# Altium PCB CYUSB3314.PcbDoc
Units mil, origin at the board's own origin, x right, y up, seen from the top; angles counter-clockwise.
Board outline 1181.1 x 1181.1 mil, 2 copper layers (Top Layer, Bottom Layer); 138 components, 96 nets, 418 pads, 25 vias.
Unrouted connection lines stored in the file: 205.
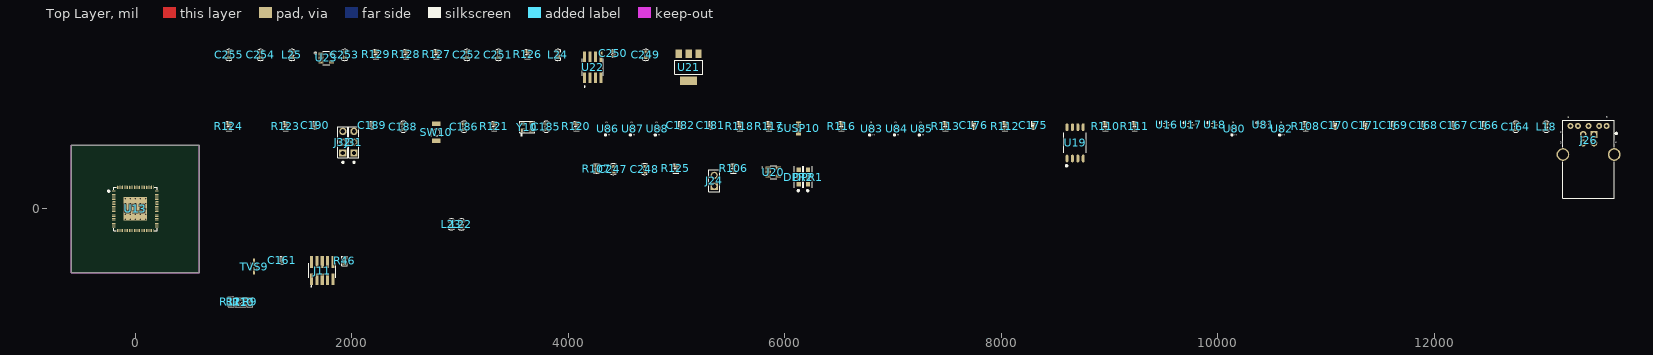
[diagram p0: Top Layer view]
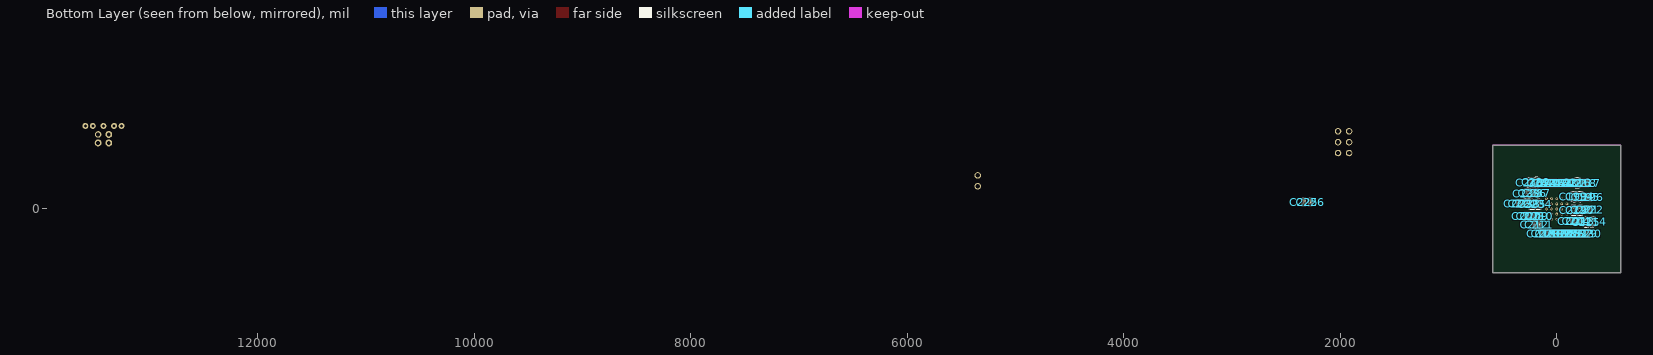
[diagram p1: Bottom Layer view, seen from below]

## Layer stack, top to bottom
Top Layer: signal copper 1.4
Dielectric: dielectric 12.6, FR-4, Dk 4.8
Bottom Layer: signal copper 1.4

## Board outline
-590.55,-590.55 590.55,-590.55 590.55,590.55 -590.55,590.55

## Design rules (kind name [scope] priority, off if disabled: settings)
Clearance [All] p1: gap=5
PolygonConnect [All] p1: connectstyle=Relief reliefconductorwidth=10 reliefentries=4 polygonreliefangle="90 Angle"
RoutingVias [All] p1: holewidth=28 width=50 viastyle="Through Hole" minholewidth=28 minwidth=50 maxholewidth=28 maxwidth=50
SilkscreenOverComponentPads [All] p1: minsilkscreentomaskgap=10
SolderMaskExpansion [All] p1: expansion=4
Width [All] p1: maxlimit=50 minlimit=5 preferedwidth=10
27 further rules are at their usual default settings.

## Classes and differential pairs
component class Cyusb3314_Indicator: C161 J11 R9 R10 R11 R12 R46 RS1 TVS9
component class Cyusb3314_Interface: C164 C166 C167 C168 C169 C170 C171 C175 C176 C181 C182 C185 C186 C188 C189 C190 C247 C248 DPR1 DPR2 J24 J26 J31 J32 L18 R106 R107 R108 R110 R111 R112 R113 R116 R117 R118 R120 R121 R123 R124 R125 SUSP10 SW10 U13 U16 U17 U18 U19 U20 U80 U81 U82 U83 U84 U85 U86 U87 U88 Y10
component class Cyusb3314_Power: C193 C194 C195 C196 C197 C198 C199 C200 C201 C202 C203 C204 C205 C206 C207 C208 C209 C210 C211 C212 C213 C214 C215 C216 C217 C218 C219 C220 C221 C222 C223 C224 C225 C226 C227 C228 C229 C230 C231 C232 C233 C234 C235 C236 C237 C238 C239 C240 C241 C242 C243 C244 C245 C246 L22 L23
component class Power: C249 C250 C251 C252 C253 C254 C255 L24 L25 R126 R127 R128 R129 U21 U22 U23

## Components (designator, comment, footprint, x,y, rotation, side; value= is the part's Value field where it differs from the comment)
C161 "0.1UF_16V" C0402 1357,-473 r90 top
C164 "1uF_16V" C0603 12755,759 r90 top
C166 "0.1UF_16V" C0402 12466,773 r90 top
C167 "0.1UF_16V" C0402 12186,773 r90 top
C168 "0.1UF_16V" C0402 11906,773 r90 top
C169 "0.1UF_16V" C0402 11626,773 r90 top
C170 "0.01UF_35V" C0402 11086,773 r90 top
C171 "0.1UF_35V" C0402 11366,773 r90 top
C175 "0.1UF_16V" C0402 8297,773 r90 top
C176 "0.1UF_16V" C0402 7748,773 r90 top
C181 "0.1UF_16V" C0402 5318,773 r90 top
C182 "0.1UF_16V" C0402 5038,773 r90 top
C185 "10pF_16V" C0603 3797,759 r90 top
C186 "10pF_16V" C0603 3037,759 r90 top
C188 "1.5uF_16V" C0603 2476,759 r90 top
C189 "0.1UF_16V" C0402 2187,773 r90 top
C190 "0.1UF_16V" C0402 1662,773 r90 top
C193 "10UF_10V" C0603 -160,114 r90 bottom
C194 "1UF_10V" C0603 -218,114.41 r90 bottom
C195 "0.1UF_10V" C0402 -267,109 r270 bottom
C196 "0.01UF_10V" C0402 -306,109 r270 bottom
C197 "0.01UF_10V" C0402 -14,-228 r90 bottom
C198 "0.1UF_10V" C0402 -54,-228 r90 bottom
C199 "0.01UF_10V" C0402 64,-228 r90 bottom
C200 "0.1UF_10V" C0402 25,-228 r90 bottom
C201 "0.01UF_10V" C0402 -143,238 r270 bottom
C202 "0.1UF_10V" C0402 -104,238 r270 bottom
C203 "0.001UF_10V" C0402 -145,-114 r90 bottom
C204 "0.01UF_10V" C0402 -184,-114 r90 bottom
C205 "0.001UF_10V" C0402 -93,-228 r90 bottom
C206 "0.01UF_10V" C0402 -132,-228 r90 bottom
C207 "0.001UF_10V" C0402 281,-67 r90 bottom
C208 "0.01UF_10V" C0402 241,-67 r90 bottom
C209 "0.001UF_10V" C0402 201,-66 r90 bottom
C210 "0.01UF_10V" C0402 161,-66 r90 bottom
C211 "0.001UF_10V" C0402 160,-146 r270 bottom
C212 "0.01UF_10V" C0402 201,-146 r270 bottom
C213 "0.1UF_10V" C0402 -223,-114 r90 bottom
C214 "1UF_10V" C0603 -331,-119.41 r270 bottom
C215 "22uF_10V" C0603 -273,-120.59 r270 bottom
C216 "10uF_16V" C0603 -191,241 r90 bottom
C217 "0.1UF_16V" C0402 -278,237 r270 bottom
C218 "0.01UF_16V" C0402 -239,236 r270 bottom
C219 "10uF_16V" C0603 -158,-12 r270 bottom
C220 "1.0uF_16V" C0603 -216,-12 r270 bottom
C221 "0.1UF_16V" C0402 -266,-7 r90 bottom
C222 "0.01UF_16V" C0402 -307,-7 r90 bottom
C223 "0.001UF_10V" C0402 354,48 r90 bottom
C224 "0.01UF_10V" C0402 315,48 r90 bottom
C225 "0.001UF_10V" C0402 2333,64 r90 bottom
C226 "0.01UF_10V" C0402 2273,62 r90 bottom
C227 "0.001UF_10V" C0402 142,-228 r90 bottom
C228 "0.01UF_10V" C0402 103,-228 r90 bottom
C229 "0.001UF_10V" C0402 -249,-228 r90 bottom
C230 "0.01UF_10V" C0402 -288,-228 r90 bottom
C231 "0.001UF_10V" C0402 -171,-228 r90 bottom
C232 "0.01UF_10V" C0402 -210,-228 r90 bottom
C233 "0.1UF_10V" C0402 276,48 r90 bottom
C234 "1UF_10V" C0603 168,43.41 r270 bottom
C235 "22uF_10V" C0603 226,42.59 r270 bottom
C236 "0.1UF_10V" C0402 221,147 r90 bottom
C237 "0.01UF_10V" C0402 182,147 r90 bottom
C238 "1UF_10V" C0603 271,142 r270 bottom
C239 "10uF_16V" C0603 187,244.59 r90 bottom
C240 "1.0uF_16V" C0603 245,243.59 r90 bottom
C241 "0.1UF_16V" C0402 95,238 r270 bottom
C242 "0.01UF_16V" C0402 137,238 r270 bottom
C243 "0.01UF_16V" C0402 -65,238 r270 bottom
C244 "0.1UF_16V" C0402 -25,238 r270 bottom
C245 "0.01UF_16V" C0402 55,238 r270 bottom
C246 "0.1UF_16V" C0402 15,238 r270 bottom
C247 "1.0uF_16V" C0603 4416,368 r90 top
C248 "1.0uF_16V" C0603 4706,368 r90 top
C249 "1u" C0603 4716,1423 r90 top
C250 "0.1u" C0402 4417,1437 r90 top
C251 "22uF_16V" C0603 3355,1423 r90 top
C252 "22uF_10V" C0603 3065,1423 r90 top
C253 "2.2nF" C0603 1935,1423 r90 top
C254 "10UF_10V" C0603 1157,1423 r90 top
C255 "22uF_6.3V" C0603 867,1423 r90 top
DPR1 "0R_0603" RC0603_3P 6216,294 r90 top
DPR2 "0R_0603" RC0603_3P 6129,294 r90 top
J11 "50MIL KEYED SMD_NL" SAMTEC_FTSH-105-01-L-DV-K 1627,-649 r0 top
J24 "HDR_1X2_NL" SAMTEC_TSW-102-08-G-S 5349,210 r90 top
J26 "USB3_B_CONN" FOXCONN_UEB1112C-2AK1-4H 13426.79,478 r0 top
J31 "3PIN JUMPER" TE_3-644456-3 2020,517 r90 top
J32 "3PIN JUMPER" TE_3-644456-3 1918,517 r90 top
L18 "BLM21PG221SN1D" L0603 13036,759 r90 top
L22 "BLM21PG221SN1D" L0603 3015,-143.41 r90 top
L23 "BLM21PG221SN1D" L0603 2921,-142.41 r90 top
L24 "4.7uH" L0603 3905,1423 r90 top
L25 "2.2uH" L0603 1447,1423 r90 top
R9 "10K" 0603S-RES 1060,-859.59 r270 top
R10 "10K" 0603S-RES 1001,-860.59 r270 top
R11 "10K" 0603S-RES 943,-859 r270 top
R12 "10K" 0603S-RES 883,-857.41 r270 top
R46 "10K" 0603S-RES 1934,-480 r90 top
R106 "10K" 0603S-RES 5528,375 r90 top
R107 "10K" 0603S-RES 4262,372 r270 top
R108 "1M_1%" 0603S-RES 10814,766 r90 top
R110 "2K" 0603S-RES 8964,766 r90 top
R111 "2K" 0603S-RES 9234,766 r90 top
R112 "200R_1%" 0603S-RES 8036,766 r90 top
R113 "6.04K_1%" 0603S-RES 7486,766 r90 top
R116 "10K" 0603S-RES 6526,766 r90 top
R117 "330R_1/8W" 0603S-RES 5856,766 r90 top
R118 "10K_NL" 0603S-RES 5586,766 r90 top
R120 "825R" 0603S-RES 4076,766 r90 top
R121 "10K" 0603S-RES 3316,766 r90 top
R123 "10K" 0603S-RES 1390,766 r90 top
R124 "10K" 0603S-RES 865,766 r90 top
R125 "1M" 0603S-RES 4995,375 r90 top
R126 "10K" 0603S-RES 3624,1430 r90 top
R127 "7.5K" 0603S-RES 2783,1430 r90 top
R128 "2.4K" 0603S-RES 2503,1430 r90 top
R129 "7.5K" 0603S-RES 2224,1430 r90 top
SUSP10 "VLMO1300-GS08" LED0805S 6128,744 r90 top
SW10 "EVQ-5PN04K" 157SW 2782,788 r90 top
TVS9 "5V/350W" SOD2513X120M 1097,-532 r90 top
U13 "CYUSB3314-88LTXC" QFN40P1000X1000X100-89M 0,0 r0 top locked
U16 "TPD2EUSB30ADRTR" SOTFL35P100X50-3M 9531,777 r0 top
U17 "TPD2EUSB30ADRTR" SOTFL35P100X50-3M 9751,777 r0 top
U18 "TPD2EUSB30ADRTR" SOTFL35P100X50-3M 9971,777 r0 top
U19 "24LC128-I/SM" SOIC127P790X203-8M 8683,611 r90 top
U20 "NCP361SNT1G" SOP95P275X110-5M 5895,341 r0 top
U21 "LM1117-5V" SOT-223 5113,1185 r0 top
U22 "AOZ1021AI" SOIC127P600X175-8M 4227,1309 r90 top
U23 "SC189CSKTRT" SOT95P280X145-5M 1764,1395 r0 top
U80 "TPD2EUSB30ADRTR" SOTFL35P100X50-3M 10152,743 r90 top
U81 "TPD2EUSB30ADRTR" SOTFL35P100X50-3M 10422,777 r0 top
U82 "TPD2EUSB30ADRTR" SOTFL35P100X50-3M 10593,743 r90 top
U83 "TPD2EUSB30ADRTR" SOTFL35P100X50-3M 6804,743 r90 top
U84 "TPD2EUSB30ADRTR" SOTFL35P100X50-3M 7034,743 r90 top
U85 "TPD2EUSB30ADRTR" SOTFL35P100X50-3M 7264,743 r90 top
U86 "TPD2EUSB30ADRTR" SOTFL35P100X50-3M 4364,743 r90 top
U87 "TPD2EUSB30ADRTR" SOTFL35P100X50-3M 4594,743 r90 top
U88 "TPD2EUSB30ADRTR" SOTFL35P100X50-3M 4824,743 r90 top
Y10 "NX3225SA-26.000000MHZ-G4" "爱普生晶振3.2×2.5MM - 无源" 3621,756 r0 top

## Footprints (in the part's own frame and the unit in brackets; to place one, negate y for a bottom-side part, rotate by r counter-clockwise, add the part's x,y. Pads: shape width x height; smd on the part's side, far side on the other; paste and mask are expansions set on the pad)
157SW [mil] "157SW"
  rect 40x78 smd: 1(0,0) 2(-157.5,0)
  silkscreen extent -120,-50 -40,50
0603S-RES [mm]
  rect 0.7x0.9 smd: 1(-0.65,0) 2(0.65,0)
  silkscreen extent -1.12,-0.64 1.12,0.64
C0402 [mil]
  rect 24x23 smd: 1(-20,0) 2(20,0)
  silkscreen extent -37,-17 37,17, body extent -20,-10 19,10, height 20
C0603 [mm]
  rect 0.7x0.9 smd: 1(0.65,0) 2(-0.65,0)
  silkscreen extent -1.31,-0.67 1.31,0.67
FOXCONN_UEB1112C-2AK1-4H [mm]
  rect 1.62x1.62 / inner round 1.524 / far side round 1.524 hole 0.92 mask+0: 1(1.25,5.353)
  round 1.62 hole 0.92 mask+0: 2(-1.25,5.353) 3(-1.25,3.353) 4(1.25,3.353)
  round 1.4 hole 0.7 mask+0: 5(-4.25,7.353) 6(-2.5,7.353) 7(0,7.353) 8(2.5,7.353) 9(4.25,7.353)
  round 3 / inner round 1.524 / far side round 1.524 hole 2.3 mask+0: 10(6.02,0.643) 11(-6.02,0.643)
  silkscreen extent -6,-9.66 6.73,8.69, body extent -6,-9.66 6,8.69, height 12.9
L0603 [mm]
  rect 0.7x0.9 smd: 1(-0.65,0) 2(0.65,0)
  silkscreen extent -1.31,-0.67 1.31,0.67
LED0805S [mm]
  rect 1.2x1.2 smd: 1(-1.05,0) 2(1.05,0)
  silkscreen extent -0.27,-0.64 0.36,0.63, body extent -0.98,-0.46 1.08,0.45, height 0.85
QFN40P1000X1000X100-89M [mm] "QFN, 88-Leads, Body 10.1x10.1mm (max), Pitch 0.40mm, IPC Low Density"
  oval 0.8x0.2 smd mask+0: 1(-5.05,4.2) 2(-5.05,3.8) 3(-5.05,3.4) 4(-5.05,3) 5(-5.05,2.6) 6(-5.05,2.2) 7(-5.05,1.8) 8(-5.05,1.4) 9(-5.05,1) 10(-5.05,0.6) 11(-5.05,0.2) 12(-5.05,-0.2) 13(-5.05,-0.6) 14(-5.05,-1) 15(-5.05,-1.4) 16(-5.05,-1.8) 17(-5.05,-2.2) 18(-5.05,-2.6) 19(-5.05,-3) 20(-5.05,-3.4) 21(-5.05,-3.8) 22(-5.05,-4.2) 45(5.05,-4.2) 46(5.05,-3.8) 47(5.05,-3.4) 48(5.05,-3) 49(5.05,-2.6) 50(5.05,-2.2) 51(5.05,-1.8) 52(5.05,-1.4) 53(5.05,-1) 54(5.05,-0.6) 55(5.05,-0.2) 56(5.05,0.2) 57(5.05,0.6) 58(5.05,1) 59(5.05,1.4) 60(5.05,1.8) 61(5.05,2.2) 62(5.05,2.6) 63(5.05,3) 64(5.05,3.4) 65(5.05,3.8) 66(5.05,4.2)
  oval 0.2x0.8 smd mask+0: 23(-4.2,-5.05) 24(-3.8,-5.05) 25(-3.4,-5.05) 26(-3,-5.05) 27(-2.6,-5.05) 28(-2.2,-5.05) 29(-1.8,-5.05) 30(-1.4,-5.05) 31(-1,-5.05) 32(-0.6,-5.05) 33(-0.2,-5.05) 34(0.2,-5.05) 35(0.6,-5.05) 36(1,-5.05) 37(1.4,-5.05) 38(1.8,-5.05) 39(2.2,-5.05) 40(2.6,-5.05) 41(3,-5.05) 42(3.4,-5.05) 43(3.8,-5.05) 44(4.2,-5.05) 67(4.2,5.05) 68(3.8,5.05) 69(3.4,5.05) 70(3,5.05) 71(2.6,5.05) 72(2.2,5.05) 73(1.8,5.05) 74(1.4,5.05) 75(1,5.05) 76(0.6,5.05) 77(0.2,5.05) 78(-0.2,5.05) 79(-0.6,5.05) 80(-1,5.05) 81(-1.4,5.05) 82(-1.8,5.05) 83(-2.2,5.05) 84(-2.6,5.05) 85(-3,5.05) 86(-3.4,5.05) 87(-3.8,5.05) 88(-4.2,5.05)
  rect 5.5x5.5 smd mask+0: 89(0,0)
  silkscreen extent -6.45,-5.1 5.1,5.1, body extent -5.05,-5.05 5.05,5.05, height 1
RC0603_3P [mm]
  rect 1.1x1 smd mask+0.079: 1(-1.7,0) 2(0,0) 3(1.7,0)
  silkscreen extent -3.37,-1 2.5,1, body extent -2.5,-1 2.5,1, height 0
SAMTEC_FTSH-105-01-L-DV-K [mm]
  rect 0.74x2.79 smd mask+0: 1(0,0) 2(0,4.07) 3(1.27,0) 4(1.27,4.07) 5(2.54,0) 6(2.54,4.07) 7(3.81,0) 8(3.81,4.07) 9(5.08,0) 10(5.08,4.07)
  silkscreen extent -0.67,-1.83 5.75,3.75, body extent -0.67,0.32 5.75,3.75, height 5.71
SAMTEC_TSW-102-08-G-S [mm]
  rect 1.72x1.72 / inner round 1.524 / far side round 1.524 hole 1.02 mask+0: 1(0,0)
  round 1.72 / inner round 1.524 / far side round 1.524 hole 1.02 mask+0: 2(2.54,0)
  silkscreen extent -1.27,-1.27 3.81,1.27, body extent -1.3,-1.3 3.84,1.3, height 8.38
SOD2513X120M [mm] "SOIC, 2-Leads, Body 1.4x1.8mm (max), Pitch 1.27mm, IPC Low Density"
  rect 1.65x0.55 smd mask+0: 1(-1.1,0) 2(1.1,0)
  silkscreen extent -0.9,-0.7 0.9,0.7, body extent -0.9,-0.7 0.9,0.7, height 1.2
SOIC127P600X175-8M [mm] "SOIC, 8-Leads, Body 5.0x4.0mm (max), Pitch 1.27mm, IPC Low Density"
  rect 2.5x0.7 smd mask+0: 1(-2.45,1.905) 2(-2.45,0.635) 3(-2.45,-0.635) 4(-2.45,-1.905) 5(2.45,-1.905) 6(2.45,-0.635) 7(2.45,0.635) 8(2.45,1.905)
  silkscreen extent -4.64,-2.5 2,2.53, body extent -2,-2.5 2,2.5, height 1.75
SOIC127P790X203-8M [mm] "SOIC, 8-Leads, Body 5.3x5.3mm (max), Pitch 1.27mm, IPC Low Density"
  oval 1.8x0.7 smd mask+0: 1(-3.675,1.905) 2(-3.675,0.635) 3(-3.675,-0.635) 4(-3.675,-1.905) 5(3.675,-1.905) 6(3.675,-0.635) 7(3.675,0.635) 8(3.675,1.905)
  silkscreen extent -5.58,-2.65 2.38,2.63, body extent -2.62,-2.63 2.63,2.63, height 2.03
SOP95P275X110-5M [mm] "SOT23, 5-Leads, Body 3.0x3.0mm (max), Pitch 0.95mm, IPC Low Density"
  rect 1.3x0.7 smd mask+0: 1(-1.15,0.95) 2(-1.15,0) 3(-1.15,-0.95) 4(1.15,-0.95) 5(1.15,0.95)
  silkscreen extent -2.77,-1.53 0.75,1.53, body extent -0.75,-1.5 0.75,1.5, height 1.1
SOT95P280X145-5M [mm] "SOT23, 5-Leads, Body 3.1x2.8mm (max), Pitch 0.95mm, IPC Low Density"
  rect 1.2x0.7 smd mask+0: 1(-1.2,0.95) 2(-1.2,0) 3(-1.2,-0.95) 4(1.2,-0.95) 5(1.2,0.95)
  silkscreen extent -2.74,-1.55 0.87,1.55, body extent -0.87,-1.55 0.87,1.55, height 1.45
SOT-223 [mm] "TSOP, 44-Leads, Body 18.4x10.2mm (max), Pitch 0.80mm, IPC Mediu"
  rect 1.5x2 smd: 1(2.3,6.275) 2(0,6.3) 3(-2.3,6.275)
  rect 4x2 smd: 2(0,0)
  silkscreen extent -3.32,1.48 3.32,4.75, body extent -3.2,-0.36 3.3,6.54, height 1.72
SOTFL35P100X50-3M [mm]
  rect 0.58x0.2 smd mask+0: 1(-0.57,0.35) 2(-0.57,-0.35) 3(0.57,0)
  silkscreen extent -1.7,-0.65 0.43,0.7, body extent -0.45,-0.55 0.45,0.55, height 0.5
TE_3-644456-3 [mil]
  rect 68x68 / inner round 60 / far side round 60 hole 40 mask+0: 1(0,0)
  round 68 / inner round 60 / far side round 60 hole 40 mask+0: 2(100,0) 3(200,0)
  silkscreen extent -94,-46 244,46, body extent -45,-47 245,47, height 405
"爱普生晶振3.2×2.5MM - 无源" [mm]
  rect 1.05x0.85 smd: 1(-1.1,-0.8) 2(1.1,0.8) 3(1.1,-0.8) 4(-1.1,0.8)
  Top Layer pour cut-out: -1.778,1.372 -1.778,-1.372 1.778,-1.372 1.778,1.372
  silkscreen extent -1.78,-2.03 1.78,1.37

## Part data
C161: library part "0.1 uFd 0402", "CAP .1UF 16V CERAMIC Y5V 0402"
C164 C166 C167 C168 C169 C170 C171 C175 C176 C181 C182 C185 C186 C189 C190 C193 C194 C195 C196 C197 C198 C199 C200 C201 C202 C203 C204 C205 C206 C207 C208 C209 C210 C211 C212 C213 C214 C215 C216 C217 C218 C219 C220 C221 C222 C223 C224 C225 C226 C227 C228 C229 C230 C231 C232 C233 C234 C235 C236 C237 C238 C239 C240 C241 C242 C243 C244 C245 C246 C252 C254 C255: library part "CAPACITOR NON-POL"
C188: library part "CAPACITOR NON-POL", "CAP CER 1.5UF 10V 10% X7R 0805"
C247 C248: library part CAP, "CAP - CER, 1uF, 10V, +/-10%, X5R, 0402"
C249: library part Cap, "50V/8.2u/0805"
C250: library part CAP0805, "Capacitor"
C251: library part "CAP POL", "CAP TANT 22UF 16V 10% 1206"
C253: library part "CAPACITOR NON-POL", "CAP CER 2200PF 50V 10% X7R 0805"
DPR1 DPR2: library part DPR12_0, "Resistor, 4.7K, 0402, 1/10W, 5%"
J11: library part "10 Pin Header 50mil Keyed SMD", "CONN HEADER 10 PIN 50MIL KEYED SMD"
J24: library part HEADER_1x2
J26: library part UEB1112C-2AK1-4H, "USB 3.0 B Series Right Angle,T/H 9 Pos"
J31 J32: library part "3PIN JUM", "CONN HEADER VERT 3POS .100 TIN"
L18 L22 L23: library part INDUCTOR, "FERRITE CHIP 220 OHM 2A 0805"
L24: library part INDUCTOR, "INDUCTOR 4.7UH 2.7A 20% SMD"
L25: library part INDUCTOR, "INDUCTOR 2.2UH 1.20A 20% 1210"
R9 R10 R11 R12 R112: library part R_Dup1, "RES 200 OHM 1% 0603 SMD"
R46 R116 R118 R126: library part R_Dup1, "RES 10.0K OHM 1/10W 1% 0603 SMD"
R106 R107 R117 R120 R121 R123 R124: library part R_Dup1
R108: library part R, "RES 1M OHM 1/10W 1% 0603 SMD"
R110 R111: library part R_Dup1, "RES 2.00K OHM 1/10W 1% 0603 SMD"
R113: library part R_Dup1, "RES 6.04K OHM .25W 1% 0603 SMD"
R125: library part R, "RES 1.00M OHM 1/10W 1% 0402 SMD"
R127 R129: library part R_Dup1, "RES 7.5K OHM 1/10W 1% 0603 SMD"
R128: library part R_Dup1, "RES 2.4K OHM 1/10W 1% 0603 SMD"
SUSP10: library part LED
SW10: library part B3U1000P
TVS9: library part "TVS 5V SOD-323_0", "TVS UNIDIR 350W 5V SOD-323"
U13: library part CYUSB3314-88LTXC_2
U19: library part 24LC128, "IC EEPROM 128KBIT 400KHZ 8SOIC"
U20: library part NCP361SNT1G_0, "IC USB POS OVP/OC_TSOP5"
U21: library part AMS1117
U22: "IC REG BUCK SYNC ADJ 3A 8SOIC"
U23: "IC REG BUCK SYNC 1.2V SOT23-5"
Y10: library part CRYSTAL_1

## Via types
v1: diameter 25.98, hole 12.99, Top Layer to Bottom Layer, 25 vias

## Nets (pads, with @x,y where several pads share a name; then routed paths per layer and width w, separated by ;. In a path a pad name is that pad's centre, name@x,y a point inside that pad or via, vN(x,y) a via of type N, cw(c..) or ccw(c..) an arc to the next point about the centre after c; other vN are vias at no path point)
AVDD12: C223.2 C224.2 C225.2 C226.2 C227.2 C228.2 C229.2 C230.2 C231.2 C232.2 C233.2 C234.2 C235.2 C236.2 C237.2 C238.2 L22.1 U13.15 U13.21 U13.44 U13.56 U13.62 U13.67
DS1_PWREN: U13.38
DS1_TXM: C168.2 U13.58
DS1_TXP: C169.2 U13.57
DS2_PWREN: U13.86
DS2_TXM: C175.2 U13.52
DS2_TXP: C176.2 U13.51
DS3_PWREN: U13.87
DS3_TXM: C181.2 U13.49
DS3_TXP: C182.2 U13.48
DS4_PWREN: U13.35
DS4_TXM: C189.2 U13.17
DS4_TXP: C190.2 U13.16
DVDD12: C193.2 C194.2 C195.2 C196.2 C197.2 C198.2 C199.2 C200.2 C201.2 C202.2 C203.2 C204.2 C205.2 C206.2 C207.2 C208.2 C209.2 C210.2 C211.2 C212.2 C213.2 C214.2 C215.2 C255.1 L22.2 L25.2 U13.8 U13.12 U13.18 U13.24 U13.33 U13.47 U13.53 U13.59 U13.83 U23.4
GND: C161.2 C164.1 C170.2 C171.2 C185.1 C186.1 C188.2 C193.1 C194.1 C195.1 C196.1 C197.1 C198.1 C199.1 C200.1 C201.1 C202.1 C203.1 C204.1 C205.1 C206.1 C207.1 C208.1 C209.1 C210.1 C211.1 C212.1 C213.1 C214.1 C215.1 C216.1 C217.1 C218.1 C219.1 C220.1 C221.1 C222.1 C223.1 C224.1 C225.1 C226.1 C227.1 C228.1 C229.1 C230.1 C231.1 C232.1 C233.1 C234.1 C235.1 C236.1 C237.1 C238.1 C239.1 C240.1 C241.1 C242.1 C243.1 C244.1 C245.1 C246.1 C247.2 C248.2 C249.1 C250.2 C251.2 C252.2 C253.1 C254.2 C255.2 DPR2.3 J11.3 J11.5 J11.7 J11.9 J26.4 J26.7 J31.3 J32.3 R107.2 R108.2 R112.2 R113.2 R117.2 R120.2 R128.2 SW10.1 TVS9.2 U13.50 U13.89 U16.3 U17.3 U18.3 U19.1 U19.2 U19.3 U19.4 U19.7 U20.2 U20.3 U21.1 U22.1 U22.3 U23.2 U80.3 U81.3 U82.3 U83.3 U84.3 U85.3 U86.3 U87.3 U88.3 Y10.2 Y10.4
  other v1: -94.49,-94.49 -47.24,-94.49 0,-94.49 47.24,-94.49 94.49,-94.49 -94.49,-47.24 -47.24,-47.24 0,-47.24 47.24,-47.24 94.49,-47.24 -94.49,0 -47.24,0 0,0 47.24,0 94.49,0 -94.49,47.24 -47.24,47.24 0,47.24 47.24,47.24 94.49,47.24 -94.49,94.49 -47.24,94.49 0,94.49 47.24,94.49 94.49,94.49
I2C_DEV_ID: U13.30
I2C_SCL: R111.1 U13.40 U19.6
I2C_SDA: R110.1 U13.41 U19.5
MODE_SEL0: R123.1 U13.28
MODE_SEL1: R124.1 U13.29
NetC164_2: C164.2 J26.1 L18.2
NetC170_1: C170.1 C171.1 J26.10 J26.11 R108.1
NetC188_1: C188.1 J11.10 R121.1 SW10.2 U13.37
NetC219_2: C219.2 C220.2 C221.2 C222.2 C239.2 C240.2 C241.2 C242.2 C243.2 C244.2 C245.2 C246.2 L23.2 U13.9 U13.70 U13.75 U13.80
NetC253_2: C253.2 R129.2
NetDPR1_2: DPR1.2 R106.1
NetDPR2_2: DPR2.2 U13.23
NetJ11_4: J11.4 R116.2 U13.27
NetJ31_2: J31.2 R123.2
NetJ32_2: J32.2 R124.2
NetL24_1: L24.1 U22.7 U22.8
NetL25_1: L25.1 U23.5
NetR9_2: R9.2 U13.42
NetR10_2: R10.2 U13.1
NetR11_2: R11.2 U13.65
NetR12_2: R12.2 U13.36
NetR106_2: R106.2 R107.1 U13.22
NetR117_1: R117.1 SUSP10.2
NetR125_1: R125.1 U20.4
NetR126_2: R126.2 U22.6
NetR127_2: R127.2 R128.1 U22.4
NetR129_1: R129.1 U22.5
NON_REM0: U13.5
NON_REM1: U13.6
PIN_STRAP_EN: R120.1 U13.63
PORT_DIS0: U13.3
PORT_DIS1: U13.4
PWR_EN_SEL: U13.84
PWR_SW_POL: U13.31
RREF_SS: R112.1 U13.32
RREF_USB2: R113.1 U13.7
SUSPEND: SUSP10.1 U13.25
SWD_IO: J11.2 R46.2 U13.26
US_OVRCURR: R118.2 U13.39
US_TXM: C166.1 U13.10
US_TXP: C167.1 U13.11
USB_DS1_DM: U13.73 U80.2
USB_DS1_DP: U13.74 U80.1
USB_DS1_RXM: U13.60 U81.2
USB_DS1_RXP: U13.61 U81.1
USB_DS1_TXM: C168.1 U82.2
USB_DS1_TXP: C169.1 U82.1
USB_DS2_DM: U13.77 U83.2
USB_DS2_DP: U13.76 U83.1
USB_DS2_RXM: U13.54 U84.2
USB_DS2_RXP: U13.55 U84.1
USB_DS2_TXM: C175.1 U85.2
USB_DS2_TXP: C176.1 U85.1
USB_DS3_DM: U13.78 U86.2
USB_DS3_DP: U13.79 U86.1
USB_DS3_RXM: U13.46 U87.2
USB_DS3_RXP: U13.45 U87.1
USB_DS3_TXM: C181.1 U88.2
USB_DS3_TXP: C182.1 U88.1
USB_DS4_DM: U13.82
USB_DS4_DP: U13.81
USB_DS4_RXM: U13.19
USB_DS4_RXP: U13.20
USB_DS4_TXM: C189.1
USB_DS4_TXP: C190.1
USB_US_DM: J26.2 U13.72 U16.2
USB_US_DP: J26.3 U13.71 U16.1
USB_US_RXM: J26.8 U13.13 U18.2
USB_US_RXP: J26.9 U13.14 U18.1
USB_US_TXM: C166.2 J26.5 U17.2
USB_US_TXP: C167.2 J26.6 U17.1
V3P3: C161.1 C216.2 C217.2 C218.2 C252.1 C254.1 J11.1 J31.1 J32.1 L23.1 L24.2 R9.1 R10.1 R11.1 R12.1 R46.1 R110.2 R111.2 R116.1 R118.1 R121.2 R127.1 TVS9.1 U13.34 U13.66 U13.88 U19.8 U23.1 U23.3
VBUS_IN: C247.1 J24.1 L18.1 R125.2 U20.1
VBUS_PROTECT: C248.1 DPR1.1 U20.5
VCC(+5V): C249.2 C250.1 C251.1 DPR1.3 DPR2.1 J24.2 R126.1 U21.2 U22.2
VCC_9V: U21.3
VID_SEL0: U13.43
VID_SEL1: U13.64
VID_SEL2: U13.85
XTALIN: C186.2 U13.69 Y10.3
XTALOUT: C185.2 U13.68 Y10.1
pads on no net: J11.6 J11.8 U13.2

## Keep-outs
Keep-Out Layer:
  the board outline again, w7.87

## Text inside footprints (layer, text, board x,y; h text height)
DPR1: Mechanical 14 "RC0603_3P" at 6156,199 h25 r90
DPR2: Mechanical 14 "RC0603_3P" at 6069,199 h25 r90
J26: Top Overlay "9" at 13591.79,828 h25; Top Overlay "5" at 13236.79,828 h25; Top Overlay "2" at 13166.79,688 h25; Top Overlay "3" at 13166.79,593 h25; Top Overlay "4" at 13671.79,598 h25; Mechanical 14 "FOXCONN_UEB1112C-2AK1-4H" at 13136.79,908 h25; Mechanical 16 "FOXCONN_UEB1112C-2AK1-4H" at 13141.5,940.58 h25; Mechanical 16 "C300H230" at 13320.5,-114.26 h25; Mechanical 16 "C162H92" at 13332.94,-59.39 h25; Mechanical 16 "C140H70" at 13331.47,-7.44 h25; Mechanical 16 "S140H70" at 13332.96,45.94 h25
U13: Mechanical 14 "QFN40P1000X1000X100-89M" at -328.66,329.32 h31.5
U16: Top Overlay "2" at 9464.07,741.57 h25; Top Overlay "3" at 9578.24,765.19 h25
U17: Top Overlay "2" at 9684.07,741.57 h25; Top Overlay "3" at 9798.24,765.19 h25
U18: Top Overlay "2" at 9904.07,741.57 h25; Top Overlay "3" at 10018.24,765.19 h25
U19: Mechanical 14 "B70_180" at 8875.64,514.74 h25 r90
U23: Mechanical 14 "R70_120" at 1686,1263 h25
U80: Top Overlay "2" at 10187.43,676.07 h25 r90; Top Overlay "3" at 10163.81,790.24 h25 r90
U81: Top Overlay "2" at 10355.07,741.57 h25; Top Overlay "3" at 10469.24,765.19 h25
U82: Top Overlay "2" at 10628.43,676.07 h25 r90; Top Overlay "3" at 10604.81,790.24 h25 r90
U83: Top Overlay "2" at 6839.43,676.07 h25 r90; Top Overlay "3" at 6815.81,790.24 h25 r90
U84: Top Overlay "2" at 7069.43,676.07 h25 r90; Top Overlay "3" at 7045.81,790.24 h25 r90
U85: Top Overlay "2" at 7299.43,676.07 h25 r90; Top Overlay "3" at 7275.81,790.24 h25 r90
U86: Top Overlay "2" at 4399.43,676.07 h25 r90; Top Overlay "3" at 4375.81,790.24 h25 r90
U87: Top Overlay "2" at 4629.43,676.07 h25 r90; Top Overlay "3" at 4605.81,790.24 h25 r90
U88: Top Overlay "2" at 4859.43,676.07 h25 r90; Top Overlay "3" at 4835.81,790.24 h25 r90